# EAGLE board Copypaste (EAGLE 7.6.0), part 1 of 2
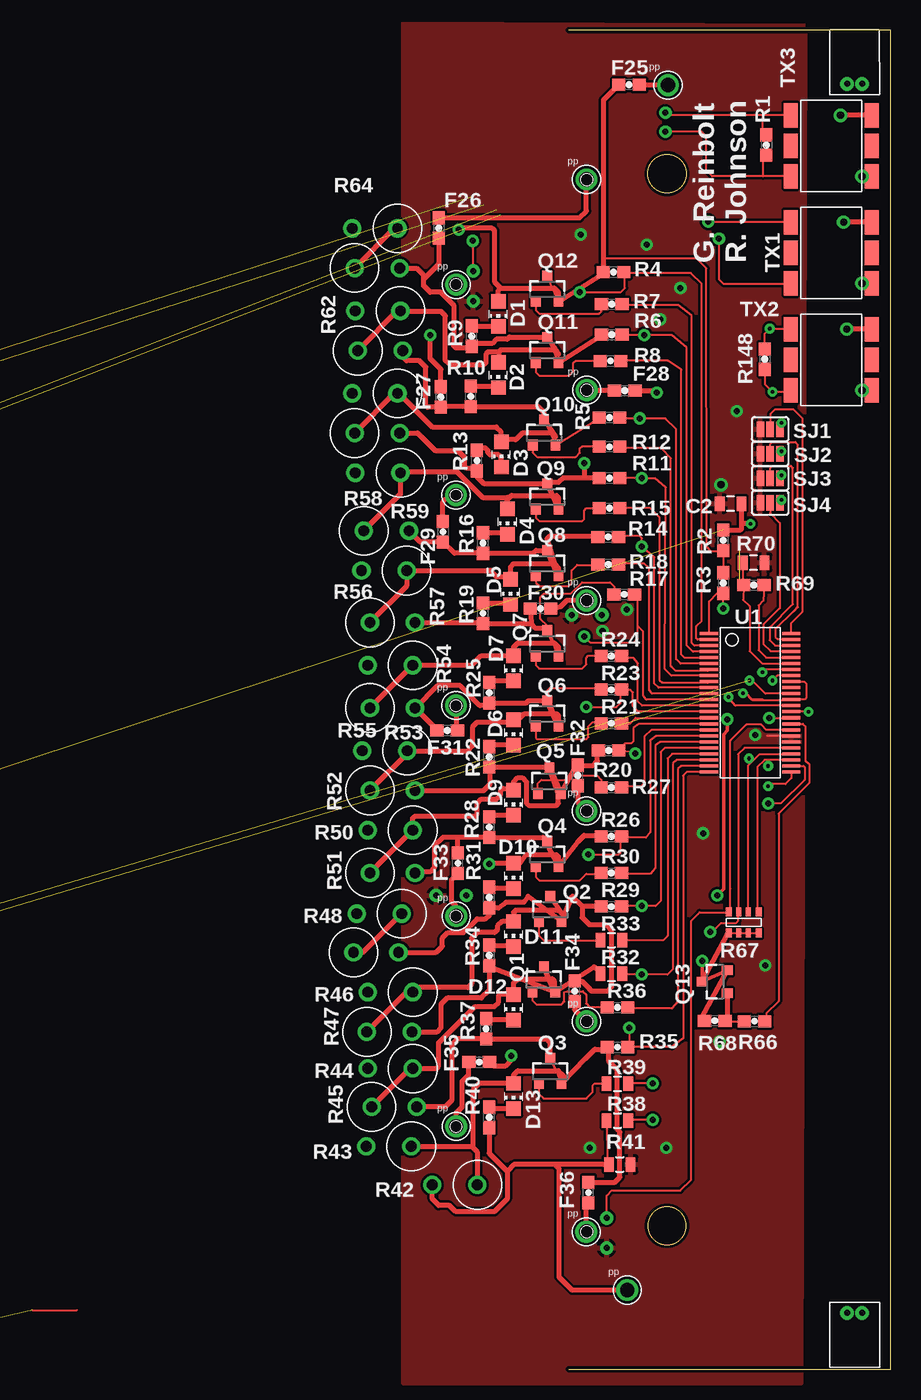
[diagram p0: board, top side]
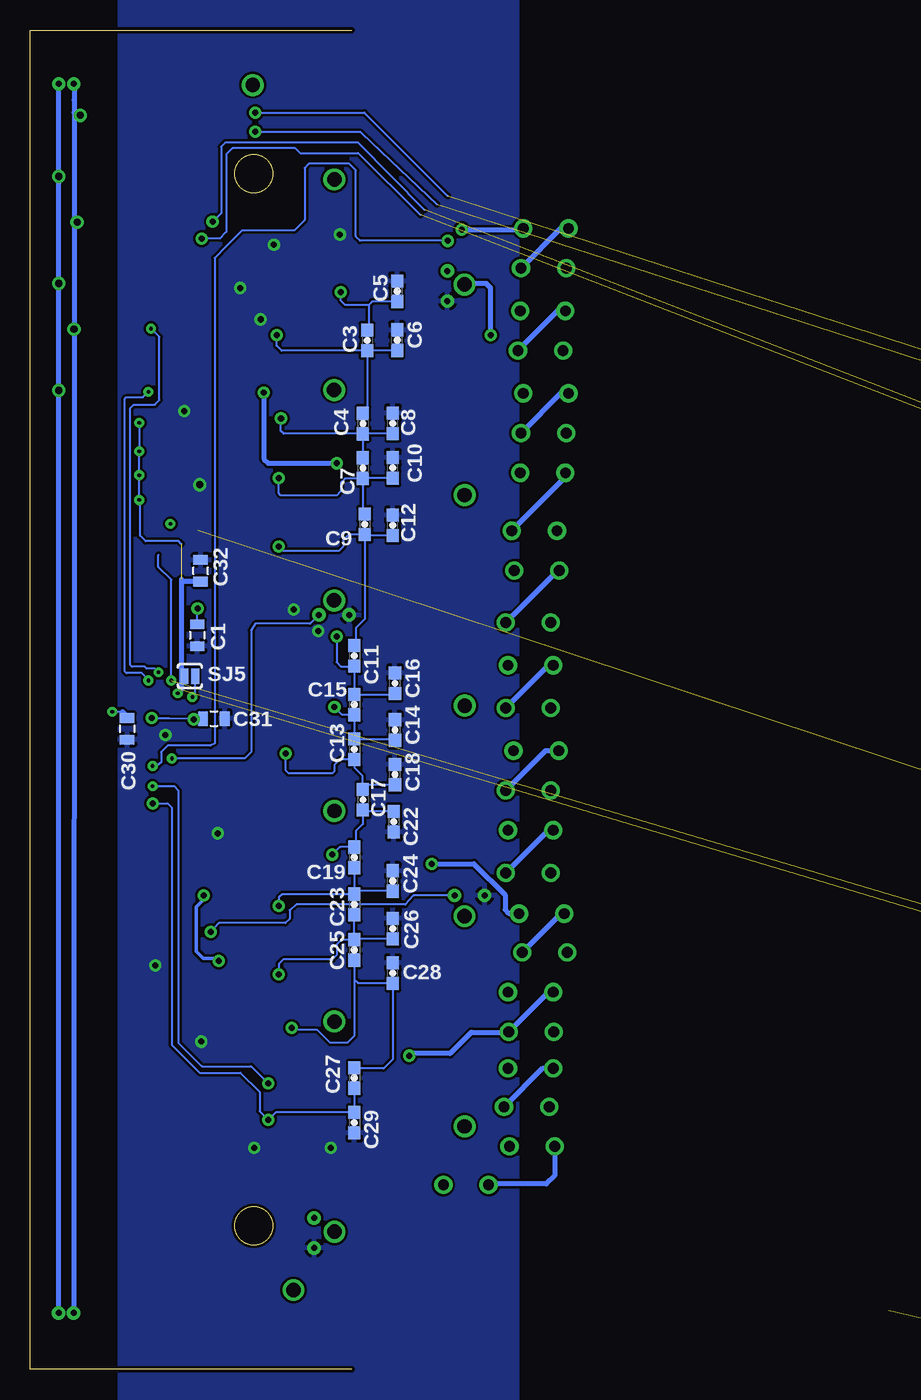
[diagram p1: board, bottom side, seen from below]

Size 26.75 x 111.35 mm. Coordinates in mm from the lower left corner, seen from the top.
Outline: 0,0 26.75,0 26.75,111.35 0,111.35
Outline: circle at 8.15,99.42 radius 1.6
Outline: circle at 8.15,11.94 radius 1.57
Copper layers (1*16): Top 0.035mm / dielectric 1.5mm / Bottom 0.035mm
Design rules "SparkFun *": minimum track width 7mil, minimum drill 12mil, track to track 8mil, track to pad 8mil, pad to pad 8mil, via to via 8mil, smd to smd 8mil, copper to edge 10mil, drill to drill 8mil, minimum pad ring 12mil, minimum via ring 10mil, stop-mask expansion 4mil, vias tented up to drill 25mil, thermal gap 10mil

## Footprints (pad centres in the part's own frame; a part is rotated, then mirrored left to right if it is on the bottom)
0805 = smd 0.8 x 1.2: 1 -0.9,0; 2 0.9,0
0603 = smd 1.1 x 1: 1 -0.85,0; 2 0.85,0
CHIP_LED0805 = smd 1.2 x 1.2: A 0,-1.05; C 0,1.05
DF13-2P = drill 0.5: 1 -0.625,0; 2 0.625,0
SOT23 = smd 0.8 x 0.9: 1 -0.95,-1; 2 0.95,-1; 3 0,1.1
RR02J16RTB = drill 0.9: P$1 -3.75,0; P$2 0,0
MNR14 = smd 0.5 x 0.75: 1 -1.25,-0.9; 4 1.25,-0.9; 5 1.25,0.85; 8 -1.25,0.85 | smd 0.4 x 0.75: 2 -0.4,-0.9; 3 0.4,-0.9; 6 0.4,0.85; 7 -0.4,0.85
NTC-NXRT15XH103FA5B = drill 0.5: P$1 0,0; P$2 2.5,0
PAD-JUMPER-3-NO_YES_SILK = smd 0.635 x 1.27: 1 -0.813,0; 2 0,0; 3 0.813,0
PAD-JUMPER-2-NO_YES_SILK = smd 0.635 x 1.27: 1 -0.45,0; 2 0.45,0
PE-68386NLT = smd 1.143 x 2.032: 1 -3.378,2.54; 2 -3.378,0; 3 -3.378,-2.54; 4 3.353,-2.54; 5 3.353,0; 6 3.353,2.54
SSOP-48 = smd 0.25 x 1.524: 1 -5.75,-3.421; 2 -5.25,-3.421; 3 -4.75,-3.421; 4 -4.25,-3.421; 5 -3.75,-3.421; 6 -3.25,-3.421; 7 -2.75,-3.421; 8 -2.25,-3.421; 9 -1.75,-3.421; 10 -1.25,-3.421; 11 -0.75,-3.421; 12 -0.25,-3.421; 13 0.25,-3.421; 14 0.75,-3.421; 15 1.25,-3.421; 16 1.75,-3.421; 17 2.25,-3.421; 18 2.75,-3.421; 19 3.25,-3.421; 20 3.75,-3.421; 21 4.25,-3.421; 22 4.75,-3.421; 23 5.25,-3.421; 24 5.75,-3.421; 25 5.75,3.421; 26 5.25,3.421; 27 4.75,3.421; 28 4.25,3.421; 29 3.75,3.421; 30 3.25,3.421; 31 2.75,3.421; 32 2.25,3.421; 33 1.75,3.421; 34 1.25,3.421; 35 0.75,3.421; 36 0.25,3.421; 37 -0.25,3.421; 38 -0.75,3.421; 39 -1.25,3.421; 40 -1.75,3.421; 41 -2.25,3.421; 42 -2.75,3.421; 43 -3.25,3.421; 44 -3.75,3.421; 45 -4.25,3.421; 46 -4.75,3.421; 47 -5.25,3.421; 48 -5.75,3.421
POGOPIN = drill 1.2: 1 0,0
SOT223 = smd 1.5 x 2: P$1 0,0; P$2 2.3,0; P$3 4.6,0 | smd 3.8 x 2: P$4 2.2,6.3

## Placement (x,y rotation side)
C1  0.1UF  [0805]  12.85,61.04 270 bottom
C2  0.1UF  [0805]  13.44,71.98 180 top
C3  10NF  [0603]  -1.27,85.55 270 bottom
C4  10NF  [0603]  -0.91,78.64 270 bottom
C5  DNP  [0603]  -3.76,89.64 90 bottom  (outside the outline)
C6  DNP  [0603]  -3.76,85.57 90 bottom  (outside the outline)
C7  10NF  [0603]  -0.91,74.93 270 bottom
C8  DNP  [0603]  -3.4,78.66 90 bottom  (outside the outline)
C9  10NF  [0603]  -1.07,70.26 270 bottom
C10  DNP  [0603]  -3.4,74.96 90 bottom  (outside the outline)
C11  10NF  [0603]  -0.2,59.33 270 bottom
C12  DNP  [0603]  -3.4,70.18 90 bottom  (outside the outline)
C13  10NF  [0603]  -0.2,51.56 270 bottom
C14  DNP  [0603]  -3.58,53.16 90 bottom  (outside the outline)
C15  10NF  [0603]  -0.2,55.27 270 bottom
C16  DNP  [0603]  -3.58,57.05 90 bottom  (outside the outline)
C17  10NF  [0603]  -0.91,47.37 270 bottom
C18  DNP  [0603]  -3.58,49.45 90 bottom  (outside the outline)
C19  10NF  [0603]  -0.2,42.57 270 bottom
C20  0.1UF  [0805]  -278.31,-0.51 0 top  (outside the outline)
C21  0.1UF  [0805]  -270.08,1.83 0 top  (outside the outline)
C22  DNP  [0603]  -3.48,45.54 270 bottom  (outside the outline)
C23  10NF  [0603]  -0.2,38.66 270 bottom
C24  DNP  [0603]  -3.4,40.61 90 bottom  (outside the outline)
C25  10NF  [0603]  -0.2,34.87 270 bottom
C26  DNP  [0603]  -3.4,36.65 90 bottom  (outside the outline)
C27  10NF  [0603]  -0.2,24.23 270 bottom
C28  DNP  [0603]  -3.4,32.94 90 bottom  (outside the outline)
C29  10NF  [0603]  -0.2,20.52 270 bottom
C30  1UF  [0805]  18.68,53.26 270 bottom
C31  1UF  [0805]  11.47,54.11 0 bottom
C32  1UF  [0805]  12.57,66.4 90 bottom
C33  10NF  [0603]  -294.23,20.62 270 bottom  (outside the outline)
C34  10NF  [0603]  -294.23,16.56 270 bottom  (outside the outline)
C37  10NF  [0603]  -294.23,12.5 270 bottom  (outside the outline)
C39  10NF  [0603]  -293.52,2.03 270 bottom  (outside the outline)
C41  10NF  [0603]  -293.52,-1.78 270 bottom  (outside the outline)
C43  10NF  [0603]  -293.34,-15.65 270 bottom  (outside the outline)
C45  10NF  [0603]  -293.52,-5.59 270 bottom  (outside the outline)
C47  10NF  [0603]  -293.34,-19.91 270 bottom  (outside the outline)
C49  10NF  [0603]  -293.34,-23.72 270 bottom  (outside the outline)
C51  10NF  [0603]  -293.34,-27.99 270 bottom  (outside the outline)
C53  10NF  [0603]  -293.34,-31.9 270 bottom  (outside the outline)
C55  10NF  [0603]  -293.88,-38.91 270 bottom  (outside the outline)
C57  10NF  [0603]  -293.79,-42.8 270 bottom  (outside the outline)
C58  1UF  [0805]  -268.78,-11.86 0 top  (outside the outline)
C59  1UF  [0805]  -277.75,-11.76 270 bottom  (outside the outline)
C60  1UF  [0805]  -268.43,-4.85 0 top  (outside the outline)
C61  1UF  [0805]  -268.44,-7.79 0 top  (outside the outline)
C63  0.1UF  [0805]  -332.71,18.52 90 top  (outside the outline)
C64  0.1UF  [0805]  -332.69,22.02 270 top  (outside the outline)
C65  10NF  [0603]  -355.09,20.14 270 bottom  (outside the outline)
C66  10NF  [0603]  -355.02,15.49 270 bottom  (outside the outline)
C69  10NF  [0603]  -354.89,11.25 270 bottom  (outside the outline)
C71  10NF  [0603]  -355.02,2.11 270 bottom  (outside the outline)
C73  10NF  [0603]  -355.14,-2.08 270 bottom  (outside the outline)
C75  10NF  [0603]  -355.27,-15.16 270 bottom  (outside the outline)
C77  10NF  [0603]  -355.27,-6.78 270 bottom  (outside the outline)
C79  10NF  [0603]  -355.37,-19.05 270 bottom  (outside the outline)
C81  10NF  [0603]  -355.37,-24.13 270 bottom  (outside the outline)
C83  10NF  [0603]  -355.37,-30.23 270 bottom  (outside the outline)
C85  10NF  [0603]  -355.37,-36.83 270 bottom  (outside the outline)
C87  10NF  [0603]  -355.22,-42.09 270 bottom  (outside the outline)
C89  10NF  [0603]  -342.16,-52.58 0 top  (outside the outline)
C90  1UF  [0805]  -323.98,-7.63 0 top  (outside the outline)
C91  1UF  [0805]  -324.13,-9.83 0 top  (outside the outline)
C92  1UF  [0805]  -321.72,-6.27 270 top  (outside the outline)
C93  1UF  [0805]  -331.83,26.78 180 top  (outside the outline)
D1  LED_RED  [CHIP_LED0805]  -5.87,87.76 180 top  (outside the outline)
D2  LED_RED  [CHIP_LED0805]  -5.87,82.68 180 top  (outside the outline)
D3  LED_RED  [CHIP_LED0805]  -5.61,76.07 180 top  (outside the outline)
D4  LED_RED  [CHIP_LED0805]  -5.11,70.48 180 top  (outside the outline)
D5  LED_RED  [CHIP_LED0805]  -4.85,64.64 180 top  (outside the outline)
D6  LED_RED  [CHIP_LED0805]  -4.6,52.96 180 top  (outside the outline)
D7  LED_RED  [CHIP_LED0805]  -4.6,58.29 180 top  (outside the outline)
D8  LED_RED  [CHIP_LED0805]  -304.39,30.05 180 top  (outside the outline)
D9  LED_RED  [CHIP_LED0805]  -4.6,47.12 180 top  (outside the outline)
D10  LED_RED  [CHIP_LED0805]  -4.6,41.02 180 top  (outside the outline)
D11  LED_RED  [CHIP_LED0805]  -4.6,36.2 180 top  (outside the outline)
D12  LED_RED  [CHIP_LED0805]  -4.6,30.1 180 top  (outside the outline)
D13  LED_RED  [CHIP_LED0805]  -4.6,22.73 180 top  (outside the outline)
D14  LED_RED  [CHIP_LED0805]  -304.32,23.37 180 top  (outside the outline)
D15  LED_RED  [CHIP_LED0805]  -304.06,13.72 180 top  (outside the outline)
D16  LED_RED  [CHIP_LED0805]  -304.06,9.65 180 top  (outside the outline)
D17  LED_RED  [CHIP_LED0805]  -304.06,3.3 180 top  (outside the outline)
D18  LED_RED  [CHIP_LED0805]  -303.81,-11.18 180 top  (outside the outline)
D19  LED_RED  [CHIP_LED0805]  -303.81,-4.06 180 top  (outside the outline)
D20  LED_RED  [CHIP_LED0805]  -302.79,-18.54 180 top  (outside the outline)
D21  LED_RED  [CHIP_LED0805]  -304.32,-25.4 180 top  (outside the outline)
D22  LED_RED  [CHIP_LED0805]  -304.32,-30.99 180 top  (outside the outline)
D23  LED_RED  [CHIP_LED0805]  -304.32,-39.88 180 top  (outside the outline)
D24  LED_RED  [CHIP_LED0805]  -304.32,-46.74 180 top  (outside the outline)
D25  LED_RED  [CHIP_LED0805]  -364.01,29.72 180 top  (outside the outline)
D26  LED_RED  [CHIP_LED0805]  -364.01,23.11 180 top  (outside the outline)
D27  LED_RED  [CHIP_LED0805]  -364.01,16.51 180 top  (outside the outline)
D28  LED_RED  [CHIP_LED0805]  -364.01,9.91 180 top  (outside the outline)
D29  LED_RED  [CHIP_LED0805]  -364.01,3.81 180 top  (outside the outline)
D30  LED_RED  [CHIP_LED0805]  -364.01,-9.4 180 top  (outside the outline)
D31  LED_RED  [CHIP_LED0805]  -364.01,-2.79 180 top  (outside the outline)
D32  LED_RED  [CHIP_LED0805]  -364.01,-16 180 top  (outside the outline)
D33  LED_RED  [CHIP_LED0805]  -364.01,-22.61 180 top  (outside the outline)
D34  LED_RED  [CHIP_LED0805]  -364.01,-29.21 180 top  (outside the outline)
D35  LED_RED  [CHIP_LED0805]  -364.01,-35.81 180 top  (outside the outline)
D36  LED_RED  [CHIP_LED0805]  -364.01,-42.42 180 top  (outside the outline)
F1  FUSE_750MA_63V_0603  [0603]  -344.25,41.86 180 top  (outside the outline)
F2  FUSE_750MA_63V_0603  [0603]  -355.88,27.18 180 top  (outside the outline)
F3  FUSE_750MA_63V_0603  [0603]  -355.88,20.57 180 top  (outside the outline)
F4  FUSE_750MA_63V_0603  [0603]  -355.88,13.46 180 top  (outside the outline)
F5  FUSE_750MA_63V_0603  [0603]  -355.88,7.87 180 top  (outside the outline)
F6  FUSE_750MA_63V_0603  [0603]  -355.88,0.76 180 top  (outside the outline)
F7  FUSE_750MA_63V_0603  [0603]  -355.88,-11.43 180 top  (outside the outline)
F8  FUSE_750MA_63V_0603  [0603]  -355.88,-18.03 180 top  (outside the outline)
F9  FUSE_750MA_63V_0603  [0603]  -355.88,-24.64 180 top  (outside the outline)
F10  FUSE_750MA_63V_0603  [0603]  -355.88,-31.24 180 top  (outside the outline)
F11  FUSE_750MA_63V_0603  [0603]  -355.88,-37.85 180 top  (outside the outline)
F12  FUSE_750MA_63V_0603  [0603]  -355.88,-44.45 180 top  (outside the outline)
F13  FUSE_750MA_63V_0603  [0603]  -297.97,40.89 270 top  (outside the outline)
F14  FUSE_750MA_63V_0603  [0603]  -301.52,34.34 0 top  (outside the outline)
F15  FUSE_750MA_63V_0603  [0603]  -300.36,21.06 180 top  (outside the outline)
F16  FUSE_750MA_63V_0603  [0603]  -301.85,18.01 0 top  (outside the outline)
F17  FUSE_750MA_63V_0603  [0603]  -298.15,7.24 180 top  (outside the outline)
F18  FUSE_750MA_63V_0603  [0603]  -301.4,-0.58 0 top  (outside the outline)
F19  FUSE_750MA_63V_0603  [0603]  -297.46,-8.89 180 top  (outside the outline)
F20  FUSE_750MA_63V_0603  [0603]  -302.77,-15.67 0 top  (outside the outline)
F21  FUSE_750MA_63V_0603  [0603]  -297.15,-27.61 180 top  (outside the outline)
F22  FUSE_750MA_63V_0603  [0603]  -301.93,-35.46 0 top  (outside the outline)
F23  FUSE_750MA_63V_0603  [0603]  -298.25,-42.55 180 top  (outside the outline)
F24  FUSE_750MA_63V_0603  [0603]  -300.51,-52.65 90 top  (outside the outline)
F25  FUSE_750MA_63V_0603  [0603]  5,106.81 180 top
F26  FUSE_750MA_63V_0603  [0603]  -10.82,94.89 270 top  (outside the outline)
F27  FUSE_750MA_63V_0603  [0603]  -10.64,80.85 270 top  (outside the outline)
F28  FUSE_750MA_63V_0603  [0603]  4.65,81.38 0 top
F29  FUSE_750MA_63V_0603  [0603]  -10.46,69.65 270 top  (outside the outline)
F30  FUSE_750MA_63V_0603  [0603]  -2.36,63.27 180 top
F31  FUSE_750MA_63V_0603  [0603]  -10.11,53.11 180 top  (outside the outline)
F32  FUSE_750MA_63V_0603  [0603]  0.74,49.38 90 top
F33  FUSE_750MA_63V_0603  [0603]  -9.22,42.09 90 top  (outside the outline)
F34  FUSE_750MA_63V_0603  [0603]  0.48,31.45 90 top
F35  FUSE_750MA_63V_0603  [0603]  -7.44,25.55 0 top  (outside the outline)
F36  FUSE_750MA_63V_0603  [0603]  1.63,14.71 90 top
J1  M2_DF13-2P  [DF13-2P]  23.75,4.7 180 top
J2  M2_DF13-2P  [DF13-2P]  23.74,106.88 0 top
Q1  BSS308PE  [SOT23]  -2.08,32.39 0 top
Q2  BSS308PE  [SOT23]  -1.55,38.23 0 top
Q3  BSS308PE  [SOT23]  -1.55,24.76 0 top
Q4  BSS308PE  [SOT23]  -1.8,42.8 0 top
Q5  BSS308PE  [SOT23]  -1.63,48.89 0 top
Q6  BSS308PE  [SOT23]  -1.8,54.48 0 top
Q7  BSS308PE  [SOT23]  -1.8,60.33 0 top
Q8  BSS308PE  [SOT23]  -1.8,66.98 0 top
Q9  BSS308PE  [SOT23]  -1.8,72.52 0 top
Q10  BSS308PE  [SOT23]  -2.06,77.85 0 top
Q11  BSS308PE  [SOT23]  -1.8,84.71 0 top
Q12  BSS308PE  [SOT23]  -1.8,89.79 0 top
Q13  BSS308PE  [SOT23]  12.16,32.23 90 top
Q14  BSS308PE  [SOT23]  -359.94,-34.8 90 top  (outside the outline)
Q15  BSS308PE  [SOT23]  -359.94,-28.19 90 top  (outside the outline)
Q16  BSS308PE  [SOT23]  -359.94,-41.4 90 top  (outside the outline)
Q17  BSS308PE  [SOT23]  -359.94,-21.59 90 top  (outside the outline)
Q18  BSS308PE  [SOT23]  -359.94,-14.99 90 top  (outside the outline)
Q19  BSS308PE  [SOT23]  -359.94,-8.38 90 top  (outside the outline)
Q20  BSS308PE  [SOT23]  -359.94,-1.78 90 top  (outside the outline)
Q21  BSS308PE  [SOT23]  -359.94,4.83 90 top  (outside the outline)
Q22  BSS308PE  [SOT23]  -359.94,10.92 90 top  (outside the outline)
Q23  BSS308PE  [SOT23]  -359.94,17.53 90 top  (outside the outline)
Q24  BSS308PE  [SOT23]  -359.94,24.13 90 top  (outside the outline)
Q25  BSS308PE  [SOT23]  -359.94,30.73 90 top  (outside the outline)
Q26  BSS308PE  [SOT23]  -330.46,-24.9 180 top  (outside the outline)
Q27  BSS308PE  [SOT23]  -299.24,-38.86 90 top  (outside the outline)
Q28  BSS308PE  [SOT23]  -299.39,-30.12 90 top  (outside the outline)
Q29  BSS308PE  [SOT23]  -299.36,-45.69 90 top  (outside the outline)
Q30  BSS308PE  [SOT23]  -299.75,-24.13 90 top  (outside the outline)
Q31  BSS308PE  [SOT23]  -299.49,-18.29 90 top  (outside the outline)
Q32  BSS308PE  [SOT23]  -299.49,-11.94 90 top  (outside the outline)
Q33  BSS308PE  [SOT23]  -299.19,-3.33 90 top  (outside the outline)
Q34  BSS308PE  [SOT23]  -299.49,4.32 90 top  (outside the outline)
Q35  BSS308PE  [SOT23]  -299.75,10.92 90 top  (outside the outline)
Q36  BSS308PE  [SOT23]  -300,15.75 90 top  (outside the outline)
Q37  BSS308PE  [SOT23]  -300.51,24.38 90 top  (outside the outline)
Q38  BSS308PE  [SOT23]  -300.51,31.24 90 top  (outside the outline)
Q39  BSS308PE  [SOT23]  -273.75,-31.66 90 top  (outside the outline)
R1  DNP  [0603]  16.41,101.79 270 top
R2  100  [0603]  12.83,68.94 90 top
R3  100  [0603]  12.83,65.38 270 top
R4  100  [0603]  3.71,91.24 0 top
R5  100  [0603]  3.38,79.15 0 top
R6  100  [0603]  3.56,86.03 0 top
R7  3.3K  [0603]  3.56,88.57 0 top
R8  3.3K  [0603]  3.45,83.85 0 top
R9  475  [0603]  -8.08,85.9 90 top  (outside the outline)
R10  475  [0603]  -8.15,80.9 90 top  (outside the outline)
R11  100  [0603]  3.38,74.12 0 top
R12  3.3K  [0603]  3.38,76.71 0 top
R13  475  [0603]  -7.65,75.56 90 top  (outside the outline)
R14  100  [0603]  3.28,69.22 0 top
R15  3.3K  [0603]  3.38,71.6 0 top
R16  475  [0603]  -7.14,68.71 90 top  (outside the outline)
R17  100  [0603]  4.6,64.44 0 top
R18  3.3K  [0603]  3.28,66.93 0 top
R19  475  [0603]  -7.14,62.87 90 top  (outside the outline)
R20  100  [0603]  3.3,51.46 0 top
R21  3.3K  [0603]  3.53,53.72 0 top
R22  475  [0603]  -6.63,50.93 90 top  (outside the outline)
R23  100  [0603]  3.53,56.52 0 top
R24  3.3K  [0603]  3.53,59.31 0 top
R25  475  [0603]  -6.63,56.26 90 top  (outside the outline)
R26  100  [0603]  3.53,44.32 0 top
R27  3.3K  [0603]  3.53,48.39 0 top
R28  475  [0603]  -6.63,45.08 90 top  (outside the outline)
R29  100  [0603]  3.53,38.48 0 top
R30  3.3K  [0603]  3.53,41.28 0 top
R31  475  [0603]  -6.63,39.24 90 top  (outside the outline)
R32  100  [0805]  3.53,32.89 0 top
R33  3.3K  [0805]  3.53,35.69 0 top
R34  475  [0603]  -6.63,34.42 90 top  (outside the outline)
R35  100  [0603]  4.04,26.8 0 top
R36  3.3K  [0603]  4.04,30.1 0 top
R37  475  [0603]  -6.88,28.32 90 top  (outside the outline)
R38  100  [0805]  4.04,20.7 0 top
R39  3.3K  [0805]  4.04,23.75 0 top
R40  475  [0603]  -6.63,20.96 90 top  (outside the outline)
R41  0  [0805]  4.22,17.04 0 top
R42  16  [RR02J16RTB]  -7.61,15.35 0 top  (outside the outline)
R43  16  [RR02J16RTB]  -13.1,18.55 0 top  (outside the outline)
R44  16  [RR02J16RTB]  -12.98,25.02 0 top  (outside the outline)
R45  16  [RR02J16RTB]  -16.39,21.83 180 top  (outside the outline)
R46  16  [RR02J16RTB]  -12.98,31.37 0 top  (outside the outline)
R47  16  [RR02J16RTB]  -16.79,28.07 180 top  (outside the outline)
R48  16  [RR02J16RTB]  -13.89,37.9 0 top  (outside the outline)
R49  16  [RR02J16RTB]  -17.91,34.67 180 top  (outside the outline)
R50  16  [RR02J16RTB]  -12.98,44.83 0 top  (outside the outline)
R51  16  [RR02J16RTB]  -16.54,41.28 180 top  (outside the outline)
R52  16  [RR02J16RTB]  -16.54,48.13 180 top  (outside the outline)
R53  16  [RR02J16RTB]  -13.44,51.44 0 top  (outside the outline)
R54  16  [RR02J16RTB]  -12.98,58.55 0 top  (outside the outline)
R55  16  [RR02J16RTB]  -16.54,54.99 180 top  (outside the outline)
R56  16  [RR02J16RTB]  -13.49,66.42 0 top  (outside the outline)
R57  16  [RR02J16RTB]  -16.54,62.1 180 top  (outside the outline)
R58  16  [RR02J16RTB]  -14,74.55 0 top  (outside the outline)
R59  16  [RR02J16RTB]  -17.04,69.72 180 top  (outside the outline)
R60  16  [RR02J16RTB]  -14.25,81.15 0 top  (outside the outline)
R61  16  [RR02J16RTB]  -17.81,77.85 180 top  (outside the outline)
R62  16  [RR02J16RTB]  -14,88.01 0 top  (outside the outline)
R63  16  [RR02J16RTB]  -17.55,84.71 180 top  (outside the outline)
R64  16  [RR02J16RTB]  -14.25,94.87 0 top  (outside the outline)
R65  16  [RR02J16RTB]  -17.81,91.57 180 top  (outside the outline)
R66  1K  [0603]  15.42,28.96 0 top
R67  10K  [MNR14]  14.52,37.13 180 top
R68  100K  [0603]  12.12,28.99 180 top
R69  1.2K  [0603]  15.37,65.21 0 top
R70  787  [0805]  15.35,67.07 180 top
R71  10K-NTC  [NTC-NXRT15XH103FA5B]  -7.94,88.82 90 top  (outside the outline)
R72  10K-NTC  [NTC-NXRT15XH103FA5B]  0.24,62.74 0 top
R73  10K-NTC  [NTC-NXRT15XH103FA5B]  -11.03,39.4 0 top  (outside the outline)
R74  100  [0603]  -274.5,1.91 0 top  (outside the outline)
R75  100  [0805]  -278.31,1.91 180 top  (outside the outline)
R76  100  [0805]  -296.44,32.26 0 top  (outside the outline)
R77  100  [0603]  -296.19,16.51 0 top  (outside the outline)
R78  100  [0603]  -295.94,23.11 0 top  (outside the outline)
R79  3.3K  [0805]  -296.44,30.23 0 top  (outside the outline)
R80  3.3K  [0603]  -295.94,21.59 0 top  (outside the outline)
R81  475  [0603]  -306.4,28.19 90 top  (outside the outline)
R82  475  [0603]  -306.35,21.34 90 top  (outside the outline)
R83  100  [0603]  -295.94,12.19 0 top  (outside the outline)
R84  3.3K  [0805]  -296.19,14.48 0 top  (outside the outline)
R85  475  [0603]  -306.1,13.21 90 top  (outside the outline)
R86  100  [0603]  -295.43,5.33 0 top  (outside the outline)
R87  3.3K  [0603]  -295.94,10.41 0 top  (outside the outline)
R88  475  [0603]  -306.1,7.87 90 top  (outside the outline)
R89  100  [0603]  -295.17,-2.54 0 top  (outside the outline)
R90  3.3K  [0603]  -295.43,3.3 0 top  (outside the outline)
R91  475  [0603]  -306.35,3.05 90 top  (outside the outline)
R92  100  [0603]  -295.68,-17.27 0 top  (outside the outline)
R93  3.3K  [0603]  -295.43,-13.21 0 top  (outside the outline)
R94  475  [0603]  -306.3,-13.23 90 top  (outside the outline)
R95  100  [0603]  -295.43,-11.43 0 top  (outside the outline)
R96  3.3K  [0603]  -295.17,-4.32 0 top  (outside the outline)
R97  475  [0603]  -306.12,-6.2 90 top  (outside the outline)
R98  100  [0603]  -295.94,-22.86 0 top  (outside the outline)
R99  3.3K  [0603]  -295.68,-19.05 0 top  (outside the outline)
R100  475  [0603]  -306.6,-20.83 90 top  (outside the outline)
R101  100  [0603]  -295.66,-29.13 0 top  (outside the outline)
R102  3.3K  [0603]  -295.94,-24.89 0 top  (outside the outline)
R103  475  [0603]  -306.5,-27.38 90 top  (outside the outline)
R104  100  [0805]  -295.45,-37.62 0 top  (outside the outline)
R105  3.3K  [0805]  -295.63,-31.29 0 top  (outside the outline)
R106  475  [0603]  -306.27,-32.92 90 top  (outside the outline)
R107  100  [0603]  -294.28,-46.46 0 top  (outside the outline)
R108  3.3K  [0603]  -295.35,-40.13 0 top  (outside the outline)
R109  475  [0603]  -306.48,-41.76 90 top  (outside the outline)
R110  100  [0603]  -294.59,-53.16 0 top  (outside the outline)
R111  3.3K  [0603]  -294.26,-48.23 0 top  (outside the outline)
R112  475  [0603]  -306.4,-48.62 90 top  (outside the outline)
R113  0  [0603]  -294.63,-54.87 0 top  (outside the outline)
R114  16  [RR02J16RTB]  -312.95,-49.53 180 top  (outside the outline)
R115  16  [RR02J16RTB]  -309.14,-45.97 0 top  (outside the outline)
R116  16  [RR02J16RTB]  -309.14,-38.86 0 top  (outside the outline)
R117  16  [RR02J16RTB]  -312.95,-42.42 180 top  (outside the outline)
R118  16  [RR02J16RTB]  -309.14,-31.75 0 top  (outside the outline)
R119  16  [RR02J16RTB]  -312.95,-35.31 180 top  (outside the outline)
R120  16  [RR02J16RTB]  -309.14,-24.64 0 top  (outside the outline)
R121  16  [RR02J16RTB]  -312.95,-28.19 180 top  (outside the outline)
R122  16  [RR02J16RTB]  -309.07,-17.73 0 top  (outside the outline)
R123  16  [RR02J16RTB]  -312.95,-21.34 180 top  (outside the outline)
R124  16  [RR02J16RTB]  -312.95,-14.22 180 top  (outside the outline)
R125  16  [RR02J16RTB]  -309.14,-10.69 0 top  (outside the outline)
R126  16  [RR02J16RTB]  -309.14,-3.56 0 top  (outside the outline)
R127  16  [RR02J16RTB]  -312.95,-7.11 180 top  (outside the outline)
R128  16  [RR02J16RTB]  -309.14,3.56 0 top  (outside the outline)
R129  16  [RR02J16RTB]  -312.95,0 180 top  (outside the outline)
R130  16  [RR02J16RTB]  -309.12,10.24 0 top  (outside the outline)
R131  16  [RR02J16RTB]  -312.95,6.86 180 top  (outside the outline)
R132  16  [RR02J16RTB]  -309.14,17.02 0 top  (outside the outline)
R133  16  [RR02J16RTB]  -312.95,13.72 180 top  (outside the outline)
R134  16  [RR02J16RTB]  -309.14,23.88 0 top  (outside the outline)
R135  16  [RR02J16RTB]  -312.95,20.32 180 top  (outside the outline)
R136  16  [RR02J16RTB]  -309.14,30.48 0 top  (outside the outline)
R137  16  [RR02J16RTB]  -312.95,27.18 180 top  (outside the outline)
R138  1K  [0603]  -270.69,-31.82 90 top  (outside the outline)
R139  10K  [MNR14]  -277.51,-31.13 180 top  (outside the outline)
R140  100K  [0603]  -274.01,-35.15 180 top  (outside the outline)
R141  1.2K  [0603]  -275.46,-5.66 90 bottom  (outside the outline)
R142  787  [0805]  -277.45,-5.7 270 bottom  (outside the outline)
R143  10K-NTC  [NTC-NXRT15XH103FA5B]  -292.48,24.41 90 top  (outside the outline)
R144  10K-NTC  [NTC-NXRT15XH103FA5B]  -306.61,-1.97 90 top  (outside the outline)
R145  10K-NTC  [NTC-NXRT15XH103FA5B]  -292.62,-28.16 90 top  (outside the outline)
R146  10K-NTC  [NTC-NXRT15XH103FA5B]  -303.44,-54.73 90 top  (outside the outline)
R147  10K-NTC  [NTC-NXRT15XH103FA5B]  3.14,10.1 90 top
R148  DNP  [0603]  16.28,83.99 270 top
R149  100  [0603]  -336.6,19.46 90 top  (outside the outline)
R150  100  [0603]  -336.65,15.93 270 top  (outside the outline)
R151  100  [0603]  -355.88,31.75 180 top  (outside the outline)
R152  100  [0603]  -355.88,18.54 0 top  (outside the outline)
R153  100  [0805]  -355.88,25.15 0 top  (outside the outline)
R154  3.3K  [0603]  -355.88,29.72 0 top  (outside the outline)
R155  3.3K  [0805]  -355.88,23.11 0 top  (outside the outline)
R156  475  [0603]  -366.55,28.19 90 top  (outside the outline)
R157  475  [0603]  -366.62,21.26 90 top  (outside the outline)
R158  100  [0603]  -355.88,11.94 0 top  (outside the outline)
R159  3.3K  [0603]  -355.88,16.51 0 top  (outside the outline)
R160  475  [0603]  -366.55,14.48 90 top  (outside the outline)
R161  100  [0603]  -355.88,5.84 0 top  (outside the outline)
R162  3.3K  [0805]  -355.88,9.91 0 top  (outside the outline)
R163  475  [0603]  -366.55,7.87 90 top  (outside the outline)
R164  100  [0603]  -355.88,-0.76 0 top  (outside the outline)
R165  3.3K  [0603]  -355.88,3.81 0 top  (outside the outline)
R166  475  [0603]  -366.55,1.78 90 top  (outside the outline)
R167  100  [0603]  -355.88,-13.97 0 top  (outside the outline)
R168  3.3K  [0603]  -355.88,-9.4 0 top  (outside the outline)
R169  475  [0603]  -366.55,-11.43 90 top  (outside the outline)
R170  100  [0603]  -355.88,-7.37 0 top  (outside the outline)
R171  3.3K  [0603]  -355.88,-2.79 0 top  (outside the outline)
R172  475  [0603]  -366.55,-4.83 90 top  (outside the outline)
R173  100  [0603]  -355.88,-20.57 0 top  (outside the outline)
R174  3.3K  [0603]  -355.88,-16 0 top  (outside the outline)
R175  475  [0603]  -366.55,-18.03 90 top  (outside the outline)
R176  100  [0603]  -355.88,-27.18 0 top  (outside the outline)
R177  3.3K  [0805]  -355.88,-22.61 0 top  (outside the outline)
R178  475  [0603]  -366.55,-24.64 90 top  (outside the outline)
R179  100  [0603]  -355.85,-34.01 0 top  (outside the outline)
R180  3.3K  [0603]  -355.88,-29.21 0 top  (outside the outline)
R181  475  [0603]  -366.55,-31.24 90 top  (outside the outline)
R182  100  [0805]  -355.88,-40.39 0 top  (outside the outline)
R183  3.3K  [0805]  -355.88,-35.81 0 top  (outside the outline)
R184  475  [0603]  -366.55,-37.85 90 top  (outside the outline)
R185  100  [0603]  -343.18,-55.63 90 top  (outside the outline)
R186  3.3K  [0805]  -355.88,-42.42 0 top  (outside the outline)
R187  475  [0603]  -366.55,-44.45 90 top  (outside the outline)
R188  0  [0603]  -341.47,-55.61 90 top  (outside the outline)
R189  16  [RR02J16RTB]  -373.41,-45.47 180 top  (outside the outline)
R190  16  [RR02J16RTB]  -369.6,-42.16 0 top  (outside the outline)
R191  16  [RR02J16RTB]  -369.6,-35.56 0 top  (outside the outline)
R192  16  [RR02J16RTB]  -373.41,-38.86 180 top  (outside the outline)
R193  16  [RR02J16RTB]  -369.6,-28.96 0 top  (outside the outline)
R194  16  [RR02J16RTB]  -373.41,-32.26 180 top  (outside the outline)
R195  16  [RR02J16RTB]  -369.6,-22.35 0 top  (outside the outline)
R196  16  [RR02J16RTB]  -373.41,-25.65 180 top  (outside the outline)
R197  16  [RR02J16RTB]  -369.6,-15.75 0 top  (outside the outline)
R198  16  [RR02J16RTB]  -373.41,-19.05 180 top  (outside the outline)
R199  16  [RR02J16RTB]  -373.41,-12.45 180 top  (outside the outline)
R200  16  [RR02J16RTB]  -369.6,-9.14 0 top  (outside the outline)
R201  16  [RR02J16RTB]  -369.6,-2.54 0 top  (outside the outline)
R202  16  [RR02J16RTB]  -373.41,-5.84 180 top  (outside the outline)
R203  16  [RR02J16RTB]  -369.6,4.06 0 top  (outside the outline)
R204  16  [RR02J16RTB]  -373.41,0.76 180 top  (outside the outline)
R205  16  [RR02J16RTB]  -369.6,10.67 0 top  (outside the outline)
R206  16  [RR02J16RTB]  -373.41,7.37 180 top  (outside the outline)
R207  16  [RR02J16RTB]  -369.6,17.27 0 top  (outside the outline)
R208  16  [RR02J16RTB]  -373.41,13.97 180 top  (outside the outline)
R209  16  [RR02J16RTB]  -369.6,23.88 0 top  (outside the outline)
R210  16  [RR02J16RTB]  -373.41,20.57 180 top  (outside the outline)
R211  16  [RR02J16RTB]  -373.41,27.18 180 top  (outside the outline)
R212  16  [RR02J16RTB]  -369.6,30.48 0 top  (outside the outline)
R213  1K  [0603]  -327.74,-20.47 90 top  (outside the outline)
R214  10K  [MNR14]  -329.97,-30.4 90 top  (outside the outline)
R215  100K  [0603]  -327.74,-24.66 270 top  (outside the outline)
R216  1.2K  [0603]  -321.94,-2.86 180 top  (outside the outline)
R217  787  [0805]  -327.09,-4.61 90 top  (outside the outline)
R218  10K-NTC  [NTC-NXRT15XH103FA5B]  -348.53,-54.62 90 top  (outside the outline)
R219  10K-NTC  [NTC-NXRT15XH103FA5B]  -337.94,-28.13 90 top  (outside the outline)
R220  10K-NTC  [NTC-NXRT15XH103FA5B]  -348.89,-2.05 90 top  (outside the outline)
R221  10K-NTC  [NTC-NXRT15XH103FA5B]  -338.03,26.84 270 top  (outside the outline)
SJ1  [PAD-JUMPER-3-NO_YES_SILK]  16.73,78.16 180 top
SJ2  [PAD-JUMPER-3-NO_YES_SILK]  16.73,76.13 180 top
SJ3  [PAD-JUMPER-3-NO_YES_SILK]  16.73,74.09 180 top
SJ4  [PAD-JUMPER-3-NO_YES_SILK]  16.73,72.06 180 top
SJ5  [PAD-JUMPER-2-NO_YES_SILK]  13.47,57.64 180 bottom
SJ6  [PAD-JUMPER-3-NO_YES_SILK]  -274.08,7.31 180 top  (outside the outline)
SJ7  [PAD-JUMPER-3-NO_YES_SILK]  -274.16,10 180 top  (outside the outline)
SJ8  [PAD-JUMPER-3-NO_YES_SILK]  -274.13,12.65 180 top  (outside the outline)
SJ9  [PAD-JUMPER-3-NO_YES_SILK]  -274.13,15.3 180 top  (outside the outline)
SJ10  [PAD-JUMPER-2-NO_YES_SILK]  -269.29,-9.79 90 top  (outside the outline)
SJ11  [PAD-JUMPER-3-NO_YES_SILK]  -328.7,28.94 0 top  (outside the outline)
SJ12  [PAD-JUMPER-3-NO_YES_SILK]  -328.76,31.66 0 top  (outside the outline)
SJ13  [PAD-JUMPER-3-NO_YES_SILK]  -328.83,34.73 0 top  (outside the outline)
SJ14  [PAD-JUMPER-3-NO_YES_SILK]  -328.89,37.81 0 top  (outside the outline)
SJ15  [PAD-JUMPER-2-NO_YES_SILK]  -323.73,-5.61 90 top  (outside the outline)
TX1  PE-68386NLT  [PE-68386NLT]  21.82,92.84 0 top
TX2  PE-68386NLT  [PE-68386NLT]  21.82,83.95 0 top
TX3  PE-68386NLT  [PE-68386NLT]  21.82,101.73 0 top
U1  LTC6804-2  [SSOP-48]  15.07,55.43 270 top
U2  LTC6804-2  [SSOP-48]  -275.88,-9.82 270 top  (outside the outline)
U3  LTC6804-2  [SSOP-48]  -333.02,-9.4 270 top  (outside the outline)
U$1  POGOPIN  [POGOPIN]  4.85,6.6 0 top
U$2  POGOPIN  [POGOPIN]  1.45,11.45 0 top
U$3  POGOPIN  [POGOPIN]  -9.37,20.21 0 top  (outside the outline)
U$4  POGOPIN  [POGOPIN]  1.46,28.93 0 top
U$5  POGOPIN  [POGOPIN]  -9.36,37.69 0 top  (outside the outline)
U$6  POGOPIN  [POGOPIN]  1.46,46.43 0 top
U$7  POGOPIN  [POGOPIN]  -9.38,55.19 0 top  (outside the outline)
U$8  POGOPIN  [POGOPIN]  1.47,63.93 0 top
U$9  POGOPIN  [POGOPIN]  -9.37,72.69 0 top  (outside the outline)
U$10  POGOPIN  [POGOPIN]  1.48,81.43 0 top
U$11  POGOPIN  [POGOPIN]  -9.37,90.19 0 top  (outside the outline)
U$12  POGOPIN  [POGOPIN]  1.46,98.94 0 top
U$13  POGOPIN  [POGOPIN]  8.24,106.78 0 top
U$14  POGOPIN  [POGOPIN]  -340.82,-60.66 0 top  (outside the outline)
U$15  POGOPIN  [POGOPIN]  -350.42,-53.14 0 top  (outside the outline)
U$16  POGOPIN  [POGOPIN]  -339.54,-44.38 0 top  (outside the outline)
U$17  POGOPIN  [POGOPIN]  -350.41,-35.64 0 top  (outside the outline)
U$18  POGOPIN  [POGOPIN]  -339.56,-26.92 0 top  (outside the outline)
U$19  POGOPIN  [POGOPIN]  -350.43,-18.15 0 top  (outside the outline)
U$20  POGOPIN  [POGOPIN]  -339.55,-9.42 0 top  (outside the outline)
U$21  POGOPIN  [POGOPIN]  -350.42,-0.68 0 top  (outside the outline)
U$22  POGOPIN  [POGOPIN]  -339.57,8.11 0 top  (outside the outline)
U$23  POGOPIN  [POGOPIN]  -350.42,16.85 0 top  (outside the outline)
U$24  POGOPIN  [POGOPIN]  -339.57,25.6 0 top  (outside the outline)
U$25  POGOPIN  [POGOPIN]  -350.41,34.35 0 top  (outside the outline)
U$26  POGOPIN  [POGOPIN]  -340.83,41.84 0 top  (outside the outline)
U$27  LOGO16-2-L  [2016-2-LOGO-L]  -381.69,-45.49 90 top  (outside the outline)
U$28  NSV1C201MZ4T1G  [SOT223]  -327.94,14.99 0 top  (outside the outline)
U$29  NSV1C201MZ4T1G  [SOT223]  -399.57,-68.33 0 top  (outside the outline)
U$30  NSV1C201MZ4T1G  [SOT223]  -407.19,-68.33 0 top  (outside the outline)
U$40  POGOPIN  [POGOPIN]  -295.42,-60.65 0 top  (outside the outline)
U$41  POGOPIN  [POGOPIN]  -305.02,-53.15 0 top  (outside the outline)
U$42  POGOPIN  [POGOPIN]  -294.17,-44.39 0 top  (outside the outline)
U$43  POGOPIN  [POGOPIN]  -305.01,-35.65 0 top  (outside the outline)
U$44  POGOPIN  [POGOPIN]  -294.19,-26.89 0 top  (outside the outline)
U$45  POGOPIN  [POGOPIN]  -305,-18.17 0 top  (outside the outline)
U$46  POGOPIN  [POGOPIN]  -294.18,-9.4 0 top  (outside the outline)
U$47  POGOPIN  [POGOPIN]  -304.99,-0.66 0 top  (outside the outline)
U$48  POGOPIN  [POGOPIN]  -294.17,8.12 0 top  (outside the outline)
U$49  POGOPIN  [POGOPIN]  -305.01,16.84 0 top  (outside the outline)
U$50  POGOPIN  [POGOPIN]  -294.19,25.6 0 top  (outside the outline)
U$51  POGOPIN  [POGOPIN]  -305.01,34.36 0 top  (outside the outline)
U$52  POGOPIN  [POGOPIN]  -295.43,41.83 0 top  (outside the outline)

## Library data of the parts
C1 C2 C20 C21 C63 C64 = FSAE Electric; PARTNO: CL21B104KCC5PNC
C3 C4 C7 C9 C11 C13 C15 C17 C19 C23 C25 C27 C29 C33 C34 C37 C39 C41 C43 C45 C47 C49 C51 C53 C55 C57 C65 C66 C69 C71 C73 C75 C77 C79 C81 C83 C85 C87 C89 = FSAE Electric; PARTNO: CL10B103KC8NNNC
C5 C6 C8 C10 C12 C14 C16 C18 C22 C24 C26 C28 R1 R148 U$1-U$26 U$40-U$52 = FSAE Electric
C30-C32 C58-C61 C90-C93 = FSAE Electric; PARTNO: UMK212F105ZG-T
D1-D36 = FSAE Electric; PARTNO: LH R974-LP-1
F1-F36 = FSAE Electric; PARTNO: C2Q 750
J1 J2 = FSAE Electric; PARTNO: DF13-2P-1.25DS(20)
Q1-Q39 = FSAE Electric; PARTNO: BSS308PE H6327
R2-R6 R11 R14 R17 R20 R23 R26 R29 R35 R74 R77 R78 R83 R86 R89 R92 R95 R98 R101 R107 R110 R149-R152 R158 R161 R164 R167 R170 R173 R176 R179 R185 = FSAE Electric; PARTNO: RC0603FR-07100RL
R7 R8 R12 R15 R18 R21 R24 R27 R30 R36 R80 R87 R90 R93 R96 R99 R102 R108 R111 R154 R159 R165 R168 R171 R174 R180 = FSAE Electric; PARTNO: RC0603JR-073K3L
R9 R10 R13 R16 R19 R22 R25 R28 R31 R34 R37 R40 R81 R82 R85 R88 R91 R94 R97 R100 R103 R106 R109 R112 R156 R157 R160 R163 R166 R169 R172 R175 R178 R181 R184 R187 = FSAE Electric; PARTNO: CRCW0201475RFKED
R32 R38 R75 R76 R104 R153 R182 = FSAE Electric; PARTNO: RC0805FR-07100RL
R33 R39 R79 R84 R105 R155 R162 R177 R183 R186 = FSAE Electric; PARTNO: RC0805FR-073K3L
R41 = FSAE Electric; PARTNO: RC0805JR-070RL
R42-R65 R114-R137 R189-R212 = FSAE Electric; PARTNO: RR02J16RTB
R66 R138 R213 = FSAE Electric; PARTNO: RC0603JR-071KL
R67 R139 R214 = FSAE Electric; PARTNO: MNR14ERAPJ103
R68 R140 R215 = FSAE Electric; PARTNO: RC0603JR-07100KL
R69 R141 R216 = FSAE Electric; PARTNO: RC0603JR-071K2L
R70 R142 R217 = FSAE Electric; PARTNO: RC0805FR-07787RL
R71-R73 R143-R147 R218-R221 = FSAE Electric; PARTNO: NXFT15XH103FA1B025
R113 R188 = FSAE Electric; PARTNO: CRCW06030000Z0EA
SJ1-SJ15 = SparkFun-Passives
TX1-TX3 = FSAE Electric; PARTNO: PE-68386NLT
U1-U3 = FSAE Electric; PARTNO: LTC6804IG-2#PBF
U$27 = Pic
U$28-U$30 = FSAE Electric; PARTNO: NSV1C201MZ4T1G

## Nets
A0: SJ9.2 U2.45
A1: SJ8.2 U2.46
A2: SJ7.2 U2.47
A3: SJ6.2 U2.48
A4: SJ4.2 U1.45
A5: SJ3.2 U1.46
A6: SJ2.2 U1.47
A7: SJ1.2 U1.48
A8: SJ14.2 U3.45
A9: SJ13.2 U3.46
A10: SJ12.2 U3.47
A11: SJ11.2 U3.48
C0: C55.2 C57.1 R110.2 U2.26
C1: C53.2 C55.1 R107.2 U2.24
C2: C51.2 C53.1 R104.2 U2.22
C3: C49.2 C51.1 R101.2 U2.20
C4: C47.2 C49.1 R98.2 U2.18
C5: C43.2 C47.1 R92.2 U2.16
C6: C43.1 C45.2 R95.2 U2.14
C7: C41.2 C45.1 R89.2 U2.12
C8: C39.2 C41.1 R86.2 U2.10
C9: C37.2 C39.1 R83.2 U2.8
C10: C34.2 C37.1 R77.2 U2.6
C11: C33.2 C34.1 R78.2 U2.4
C12: C33.1 R76.2 U2.2
C13: C3.1 C5.1 R4.2 U1.2
C14: C3.2 C4.1 C6.1 R6.2 U1.4
C15: C7.2 C9.1 C10.1 R11.2 U1.8
C16: C11.2 C15.1 C16.1 R17.2 U1.12
C17: C13.1 C14.1 C15.2 R23.2 U1.14
C18: C13.2 C17.1 C18.1 R20.2 U1.16
C19: C19.2 C23.1 C24.1 R29.2 U1.20
C20: C23.2 C25.1 C26.1 R32.2 U1.22
C21: C25.2 C27.1 C28.1 R35.2 U1.24
C22: C4.2 C7.1 C8.1 R5.2 U1.6
C23: C27.2 C29.1 R38.2 U1.26
C24: C17.2 C19.1 C22.1 R26.2 U1.18
C25: C9.2 C11.1 C12.1 R14.2 U1.10
C26: C65.1 R151.2 U3.2
C27: C65.2 C66.1 R153.2 U3.4
C28: C69.2 C71.1 R158.2 U3.8
C29: C73.2 C77.1 R164.2 U3.12
C30: C75.1 C77.2 R170.2 U3.14
C31: C75.2 C79.1 R167.2 U3.16
C32: C81.2 C83.1 R176.2 U3.20
C33: C83.2 C85.1 R179.2 U3.22
C34: C85.2 C87.1 R182.2 U3.24
C35: C66.2 C69.1 R152.2 U3.6
C36: C87.2 C89.1 R185.2 U3.26
C37: C79.2 C81.1 R173.2 U3.18
C38: C71.2 C73.1 R161.2 U3.10
DRIVE: U2.38 U$29.P$1
DRIVE1: U1.38 U$30.P$1
DRIVE2: U3.38 U$28.P$1
GND: C63.2 C64.2 C89.2 C90.2 C91.2 C92.2 C93.2 R188.2 R217.1 R218.P$1 R219.P$1 R220.P$1 R221.P$1 SJ11.3 SJ12.3 SJ13.3 SJ14.3 U3.30 U3.31
GNDA: C20.2 C21.2 C57.2 C58.2 C59.2 C60.2 C61.2 R113.2 R142.1 R143.P$1 R144.P$1 R145.P$1 R146.P$1 SJ6.3 SJ7.3 SJ8.3 SJ9.3 U2.30 U2.31
GNDI: C1.2 C2.2 C5.2 C6.2 C8.2 C10.2 C12.2 C14.2 C16.2 C18.2 C22.2 C24.2 C26.2 C28.2 C29.2 C30.2 C31.2 C32.2 R41.2 R70.1 R71.P$1 R72.P$1 R73.P$1 R147.P$1 SJ1.3 SJ2.3 SJ3.3 SJ4.3 U1.30 U1.31
GPIO1: R139.1 R143.P$2 U2.27
GPIO2: R139.2 R144.P$2 U2.28
GPIO3: R139.3 R145.P$2 U2.29
GPIO4: R139.4 R146.P$2 U2.32
GPIO5: R138.2 U2.33
GPIO6: R67.2 R72.P$2 U1.28
GPIO7: R67.1 R71.P$2 U1.27
GPIO8: R67.4 R147.P$2 U1.32
GPIO9: R67.3 R73.P$2 U1.29
GPIO10: R66.2 U1.33
GPIO11: R214.2 R219.P$2 U3.28
GPIO12: R214.1 R218.P$2 U3.27
GPIO13: R214.4 R221.P$2 U3.32
GPIO14: R214.3 R220.P$2 U3.29
GPIO15: R213.2 U3.33
IBIAS: R141.2 U2.44
IBIAS1: R69.2 U1.44
IBIAS2: R216.2 U3.44
ICMP: R141.1 R142.2 U2.43
ICMP1: R69.1 R70.2 U1.43
ICMP2: R216.1 R217.2 U3.43
IMA: TX1.3 U2.41
IMA1: R148.2 TX2.3 U1.41
IMA2: R1.2 TX3.3 U3.41
IPA: TX1.1 U2.42
IPA1: R148.1 TX2.1 U1.42
IPA2: R1.1 TX3.1 U3.42
N$1: Q12.1 R7.1
N$2: D1.A Q12.3 R64.P$2 R65.P$2
N$3: D1.C R9.2
N$4: F26.2 Q11.2 R6.1 R9.1 R64.P$1 R65.P$1
N$5: Q11.1 R8.1
N$6: D2.A Q11.3 R62.P$2 R63.P$2
N$7: D2.C R10.2
N$8: F27.2 Q10.2 R5.1 R10.1 R62.P$1 R63.P$1
N$9: Q10.1 R12.1
N$10: D3.A Q10.3 R60.P$2 R61.P$2
N$11: D3.C R13.2
N$12: F28.2 Q9.2 R11.1 R13.1 R60.P$1 R61.P$1
N$13: Q9.1 R15.1
N$14: D4.A Q9.3 R58.P$2 R59.P$2
N$15: D4.C R16.2
N$16: F29.2 Q8.2 R14.1 R16.1 R58.P$1 R59.P$1
N$17: Q8.1 R18.1
N$18: D5.A Q8.3 R56.P$2 R57.P$2
N$19: D5.C R19.2
N$20: Q6.1 R21.1
N$21: D6.A Q6.3 R52.P$2 R53.P$2
N$22: D6.C R22.2
N$23: F30.2 Q7.2 R17.1 R19.1 R56.P$1 R57.P$1
N$24: Q7.1 R24.1
N$25: D7.A Q7.3 R54.P$2 R55.P$2
N$26: D7.C R25.2
N$27: F31.2 Q6.2 R23.1 R25.1 R54.P$1 R55.P$1
N$28: F32.2 Q5.2 R20.1 R22.1 R52.P$1 R53.P$1
N$29: Q5.1 R27.1
N$30: D9.A Q5.3 R50.P$2 R51.P$2
N$31: D9.C R28.2
N$32: F33.2 Q4.2 R26.1 R28.1 R50.P$1 R51.P$1
N$33: Q4.1 R30.1
N$34: D10.A Q4.3 R48.P$2 R49.P$2
N$35: D10.C R31.2
N$36: F34.2 Q2.2 R29.1 R31.1 R48.P$1 R49.P$1
N$37: Q2.1 R33.1
N$38: D11.A Q2.3 R46.P$2 R47.P$2
N$39: D11.C R34.2
N$40: F35.2 Q1.2 R32.1 R34.1 R46.P$1 R47.P$1
N$41: Q1.1 R36.1
N$42: D12.A Q1.3 R44.P$2 R45.P$2
N$43: D12.C R37.2
N$44: Q3.1 R39.1
N$45: D13.C R40.2
N$46: F25.2 Q12.2 R2.1 R3.1 R4.1
N$47: D13.A Q3.3 R42.P$2 R43.P$2
N$48: R38.1 R40.1 R41.1 R42.P$1 R43.P$1 U$1.1
N$49: F36.2 Q3.2 R35.1 R37.1 R44.P$1 R45.P$1
N$50: C2.1 R2.2 U$30.P$2
N$52: Q13.3 R67.5 R67.6 R67.7 R67.8
N$53: Q13.1 R66.1 R68.1
N$55: Q25.1 R154.1
N$56: D25.A Q25.3 R211.P$2 R212.P$2
N$57: D25.C R156.2
N$58: F2.2 Q24.2 R153.1 R156.1 R211.P$1 R212.P$1
N$59: Q24.1 R155.1
N$60: D26.A Q24.3 R209.P$2 R210.P$2
N$61: D26.C R157.2
N$62: F3.2 Q23.2 R152.1 R157.1 R209.P$1 R210.P$1
N$63: Q23.1 R159.1
N$64: D27.A Q23.3 R207.P$2 R208.P$2
N$65: D27.C R160.2
N$66: F4.2 Q22.2 R158.1 R160.1 R207.P$1 R208.P$1
N$67: Q22.1 R162.1
N$68: D28.A Q22.3 R205.P$2 R206.P$2
N$69: D28.C R163.2
N$70: F5.2 Q21.2 R161.1 R163.1 R205.P$1 R206.P$1
N$71: Q21.1 R165.1
N$72: D29.A Q21.3 R203.P$2 R204.P$2
N$73: D29.C R166.2
N$74: Q19.1 R168.1
N$75: D30.A Q19.3 R199.P$2 R200.P$2
N$76: D30.C R169.2
N$77: F6.2 Q20.2 R164.1 R166.1 R203.P$1 R204.P$1
N$78: Q20.1 R171.1
N$79: D31.A Q20.3 R201.P$2 R202.P$2
N$80: D31.C R172.2
N$81: F7.2 Q19.2 R170.1 R172.1 R201.P$1 R202.P$1
N$82: F8.2 Q18.2 R167.1 R169.1 R199.P$1 R200.P$1
N$83: Q18.1 R174.1
N$84: D32.A Q18.3 R197.P$2 R198.P$2
N$85: D32.C R175.2
N$86: F9.2 Q17.2 R173.1 R175.1 R197.P$1 R198.P$1
N$87: Q17.1 R177.1
N$88: D33.A Q17.3 R195.P$2 R196.P$2
N$89: D33.C R178.2
N$90: F10.2 Q15.2 R176.1 R178.1 R195.P$1 R196.P$1
N$91: Q15.1 R180.1
N$92: D34.A Q15.3 R193.P$2 R194.P$2
N$93: D34.C R181.2
N$94: F11.2 Q14.2 R179.1 R181.1 R193.P$1 R194.P$1
N$95: Q14.1 R183.1
N$96: D35.A Q14.3 R191.P$2 R192.P$2
N$97: D35.C R184.2
N$98: Q16.1 R186.1
N$99: D36.C R187.2
N$100: F1.2 Q25.2 R149.1 R150.1 R151.1
N$101: D36.A Q16.3 R189.P$2 R190.P$2
N$102: Q38.1 R79.1
N$103: D8.A Q38.3 R136.P$2 R137.P$2
N$104: D8.C R81.2
N$105: R185.1 R187.1 R188.1 R189.P$1 R190.P$1 U$14.1
N$106: F12.2 Q16.2 R182.1 R184.1 R191.P$1 R192.P$1
N$107: C64.1 R149.2 U$28.P$2
N$108: F14.2 Q37.2 R78.1 R81.1 R136.P$1 R137.P$1
N$110: Q37.1 R80.1
N$111: D14.A Q37.3 R134.P$2 R135.P$2
N$112: D14.C R82.2
N$113: F15.2 Q36.2 R77.1 R82.1 R134.P$1 R135.P$1
N$114: Q26.3 R214.5 R214.6 R214.7 R214.8
N$115: Q36.1 R84.1
N$116: D15.A Q36.3 R132.P$2 R133.P$2
N$117: D15.C R85.2
N$118: F16.2 Q35.2 R83.1 R85.1 R132.P$1 R133.P$1
N$119: Q26.1 R213.1 R215.1
N$121: Q35.1 R87.1
N$122: D16.A Q35.3 R130.P$2 R131.P$2
N$123: D16.C R88.2
N$124: F17.2 Q34.2 R86.1 R88.1 R130.P$1 R131.P$1
N$125: J1.2 J2.1 TX1.6 TX2.6 TX3.6
N$126: Q34.1 R90.1
N$127: D17.A Q34.3 R128.P$2 R129.P$2
N$128: D17.C R91.2
N$129: J1.1 J2.2 TX1.4 TX2.4 TX3.4
N$130: Q32.1 R93.1
N$131: D18.A Q32.3 R124.P$2 R125.P$2
N$132: D18.C R94.2
N$133: C90.1 U3.35
N$134: F18.2 Q33.2 R89.1 R91.1 R128.P$1 R129.P$1
N$135: C30.1 U1.35
N$136: Q33.1 R96.1
N$137: D19.A Q33.3 R126.P$2 R127.P$2
N$138: D19.C R97.2
N$139: F19.2 Q32.2 R95.1 R97.1 R126.P$1 R127.P$1
N$142: F20.2 Q31.2 R92.1 R94.1 R124.P$1 R125.P$1
N$144: Q31.1 R99.1
N$145: D20.A Q31.3 R122.P$2 R123.P$2
N$146: D20.C R100.2
N$147: F21.2 Q30.2 R98.1 R100.1 R122.P$1 R123.P$1
N$149: Q30.1 R102.1
N$150: D21.A Q30.3 R120.P$2 R121.P$2
N$151: D21.C R103.2
N$152: F22.2 Q28.2 R101.1 R103.1 R120.P$1 R121.P$1
N$154: Q28.1 R105.1
N$155: D22.A Q28.3 R118.P$2 R119.P$2
N$156: D22.C R106.2
N$159: F23.2 Q27.2 R104.1 R106.1 R118.P$1 R119.P$1
N$161: Q27.1 R108.1
N$162: D23.A Q27.3 R116.P$2 R117.P$2
N$163: D23.C R109.2
N$165: Q29.1 R111.1
N$166: D24.C R112.2
N$170: F13.2 Q38.2 R74.1 R75.1 R76.1
N$175: D24.A Q29.3 R114.P$2 R115.P$2
N$176: R110.1 R112.1 R113.1 R114.P$1 R115.P$1 U$40.1
N$177: F24.2 Q29.2 R107.1 R109.1 R116.P$1 R117.P$1
N$178: C21.1 R74.2 U$29.P$2
N$192: Q39.3 R139.5 R139.6 R139.7 R139.8
N$193: Q39.1 R138.1 R140.1
N$262: F12.1 U$15.1
N$264: F11.1 U$16.1
N$286: F10.1 U$17.1
N$287: F9.1 U$18.1
N$288: F8.1 U$19.1
N$289: F7.1 U$20.1
N$290: F6.1 U$21.1
N$291: F5.1 U$22.1
N$292: F4.1 U$23.1
N$293: F3.1 U$24.1
N$294: F2.1 U$25.1
N$295: F1.1 U$26.1
N$296: F24.1 U$41.1
N$297: F23.1 U$42.1
N$298: F22.1 U$43.1
N$299: F21.1 U$44.1
N$300: F20.1 U$45.1
N$301: F19.1 U$46.1
N$302: F18.1 U$47.1
N$303: F17.1 U$48.1
N$304: F16.1 U$49.1
N$305: F15.1 U$50.1
N$306: F14.1 U$51.1
N$307: F13.1 U$52.1
N$308: F36.1 U$2.1
N$309: F35.1 U$3.1
N$310: F34.1 U$4.1
N$311: F33.1 U$5.1
N$312: F32.1 U$6.1
N$313: F31.1 U$7.1
N$314: F30.1 U$8.1
N$315: F29.1 U$9.1
N$316: F28.1 U$10.1
N$317: F27.1 U$11.1
N$318: F26.1 U$12.1
N$319: F25.1 U$13.1
S1: R111.2 U2.25
S2: R108.2 U2.23
S3: R105.2 U2.21
S4: R102.2 U2.19
S5: R99.2 U2.17
S6: R93.2 U2.15
S7: R96.2 U2.13
S8: R90.2 U2.11
S9: R87.2 U2.9
S10: R84.2 U2.7
S11: R80.2 U2.5
S12: R79.2 U2.3
S13: R7.2 U1.3
S14: R8.2 U1.5
S15: R12.2 U1.7
S16: R15.2 U1.9
S17: R18.2 U1.11
S18: R21.2 U1.15
S19: R24.2 U1.13
S20: R27.2 U1.17
S21: R30.2 U1.19
S22: R33.2 U1.21
S23: R36.2 U1.23
S24: R39.2 U1.25
S25: R154.2 U3.3
S26: R155.2 U3.5
S27: R159.2 U3.7
S28: R162.2 U3.9
S29: R165.2 U3.11
S30: R168.2 U3.15
S31: R171.2 U3.13
S32: R174.2 U3.17
S33: R177.2 U3.19
S34: R180.2 U3.21
S35: R183.2 U3.23
S36: R186.2 U3.25
SWTEN: SJ10.1 U2.36
SWTEN1: SJ5.1 U1.36
SWTEN2: SJ15.1 U3.36
V+: C20.1 R75.2 U2.1
V+1: C1.1 R3.2 U1.1
V+2: C63.1 R150.2 U3.1
VREF1: C58.1 U2.35
VREF2: C59.1 Q39.2 R140.2 U2.34
VREF4: C31.1 Q13.2 R68.2 U1.34
VREF6: C91.1 Q26.2 R215.2 U3.34
VREG: C60.1 C61.1 SJ6.1 SJ7.1 SJ8.1 SJ9.1 SJ10.2 U2.37 U2.40 U$29.P$3
VREG1: C32.1 SJ1.1 SJ2.1 SJ3.1 SJ4.1 SJ5.2 U1.37 U1.40 U$30.P$3
VREG2: C92.1 C93.1 SJ11.1 SJ12.1 SJ13.1 SJ14.1 SJ15.2 U3.37 U3.40 U$28.P$3